# Altium PCB B217.PcbDoc
Units mm, origin at the board's own origin, x right, y up, seen from the top; angles counter-clockwise.
Board outline 22 x 40 mm, 4 copper layers (Top Copper, Signal Layer 1, Signal Layer 2, Bottom Copper), stack 1.57 mm thick; 32 components, 52 nets, 122 pads, 133 vias.
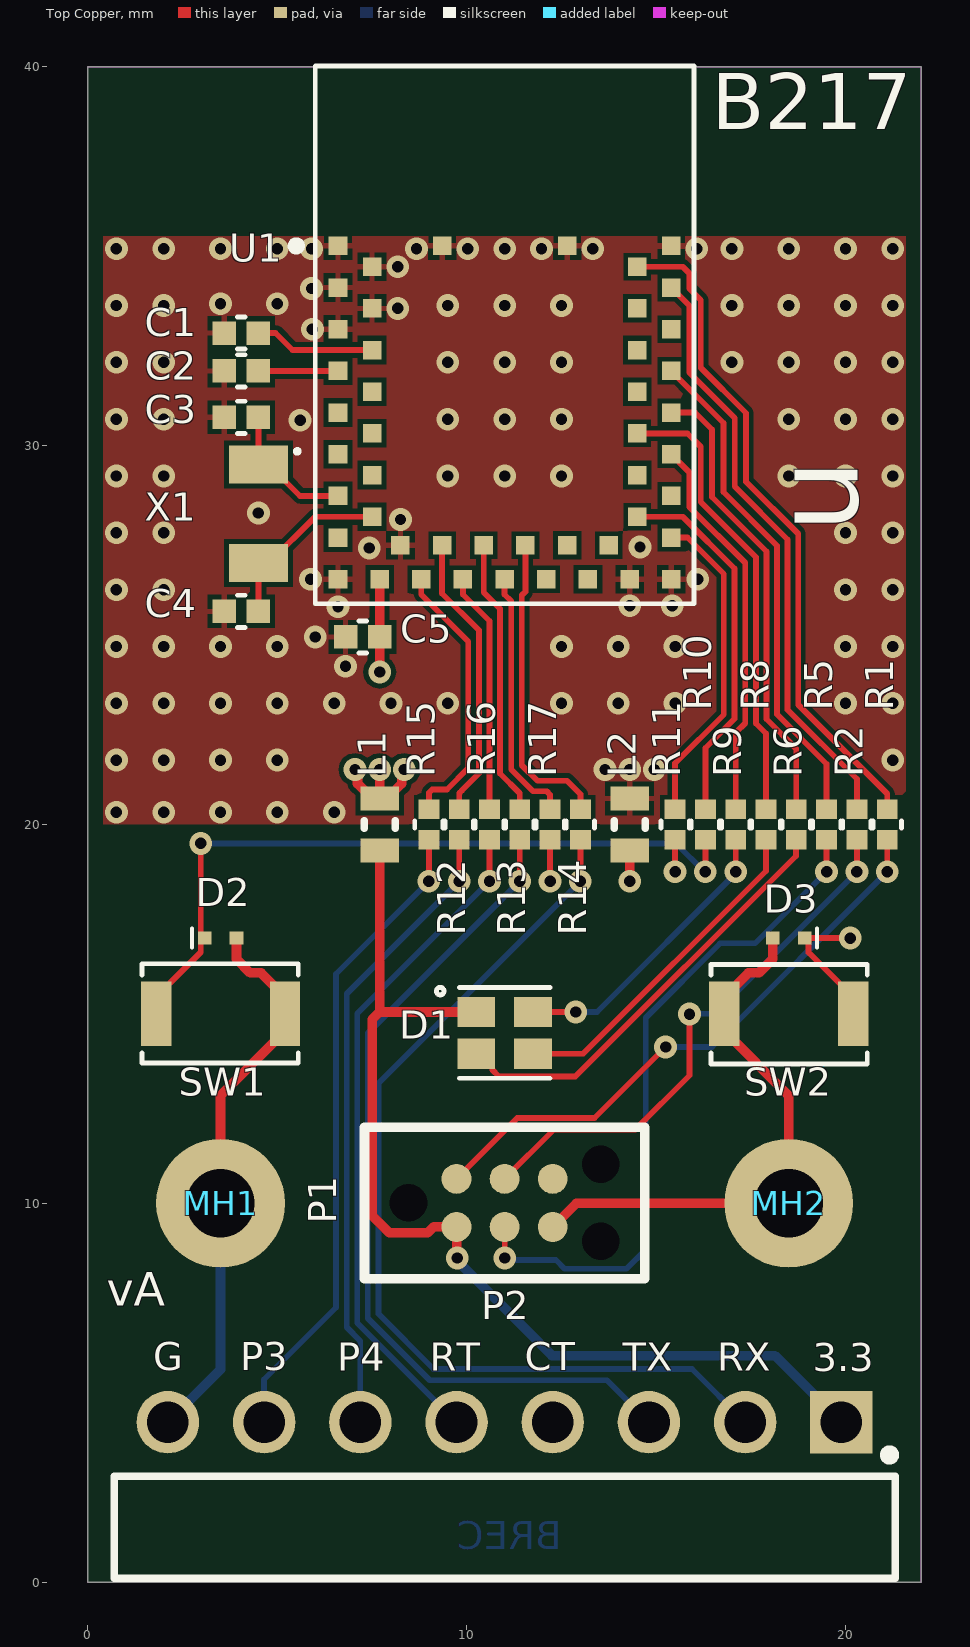
[diagram p0: Top Copper view]
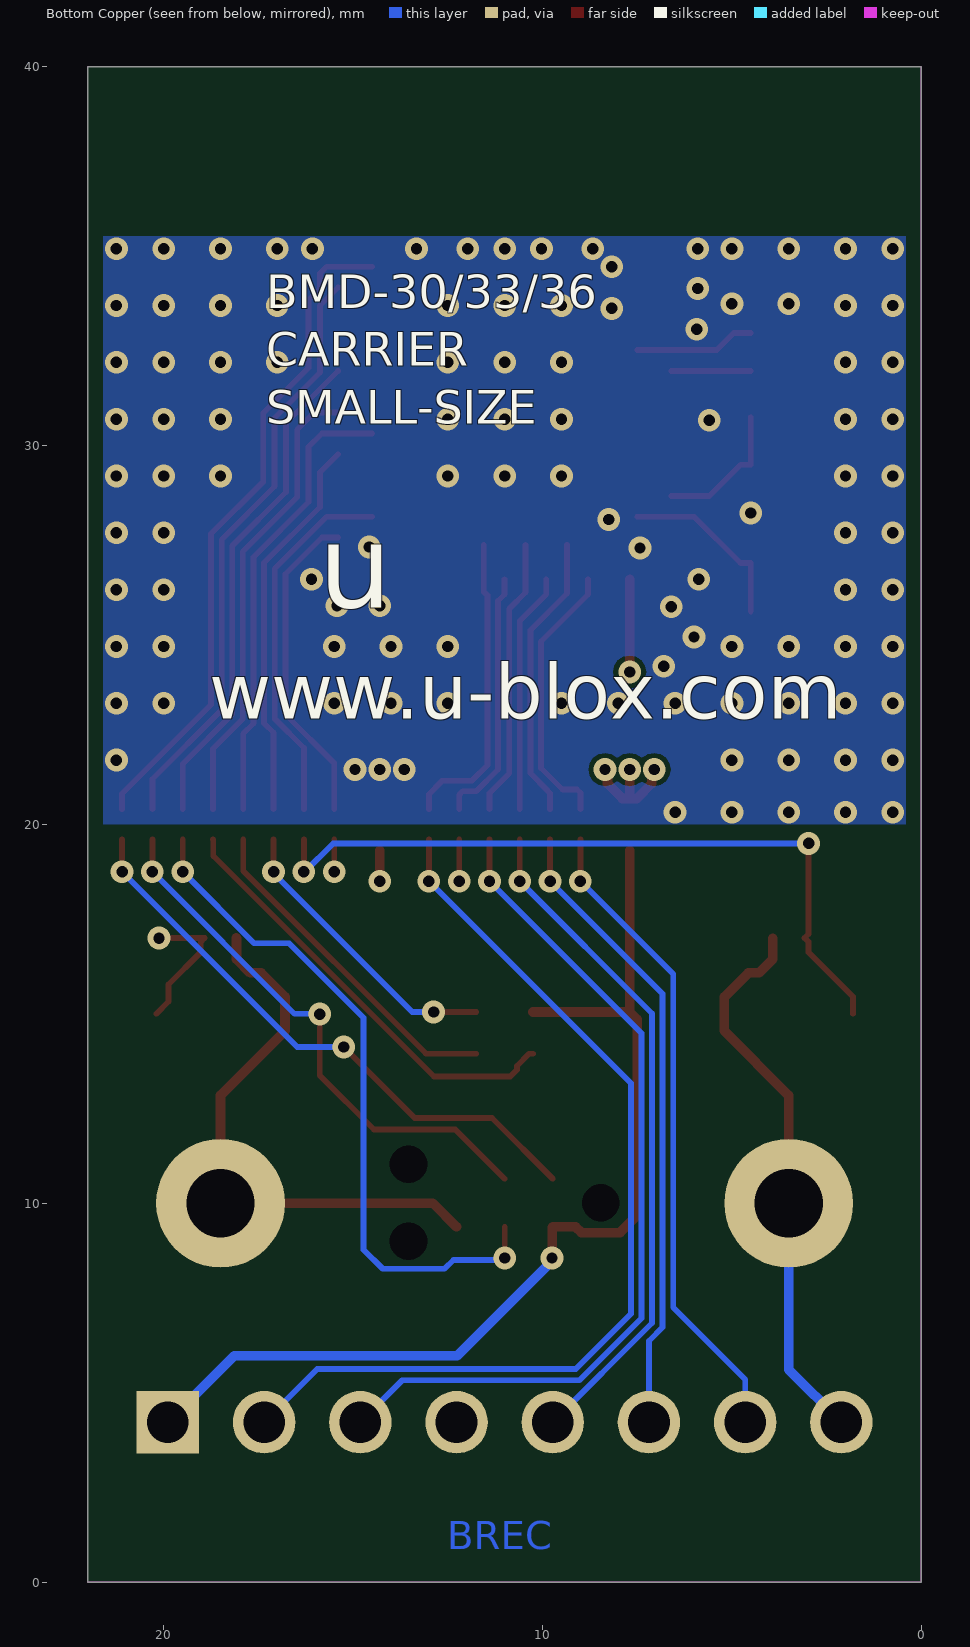
[diagram p1: Bottom Copper view, seen from below]
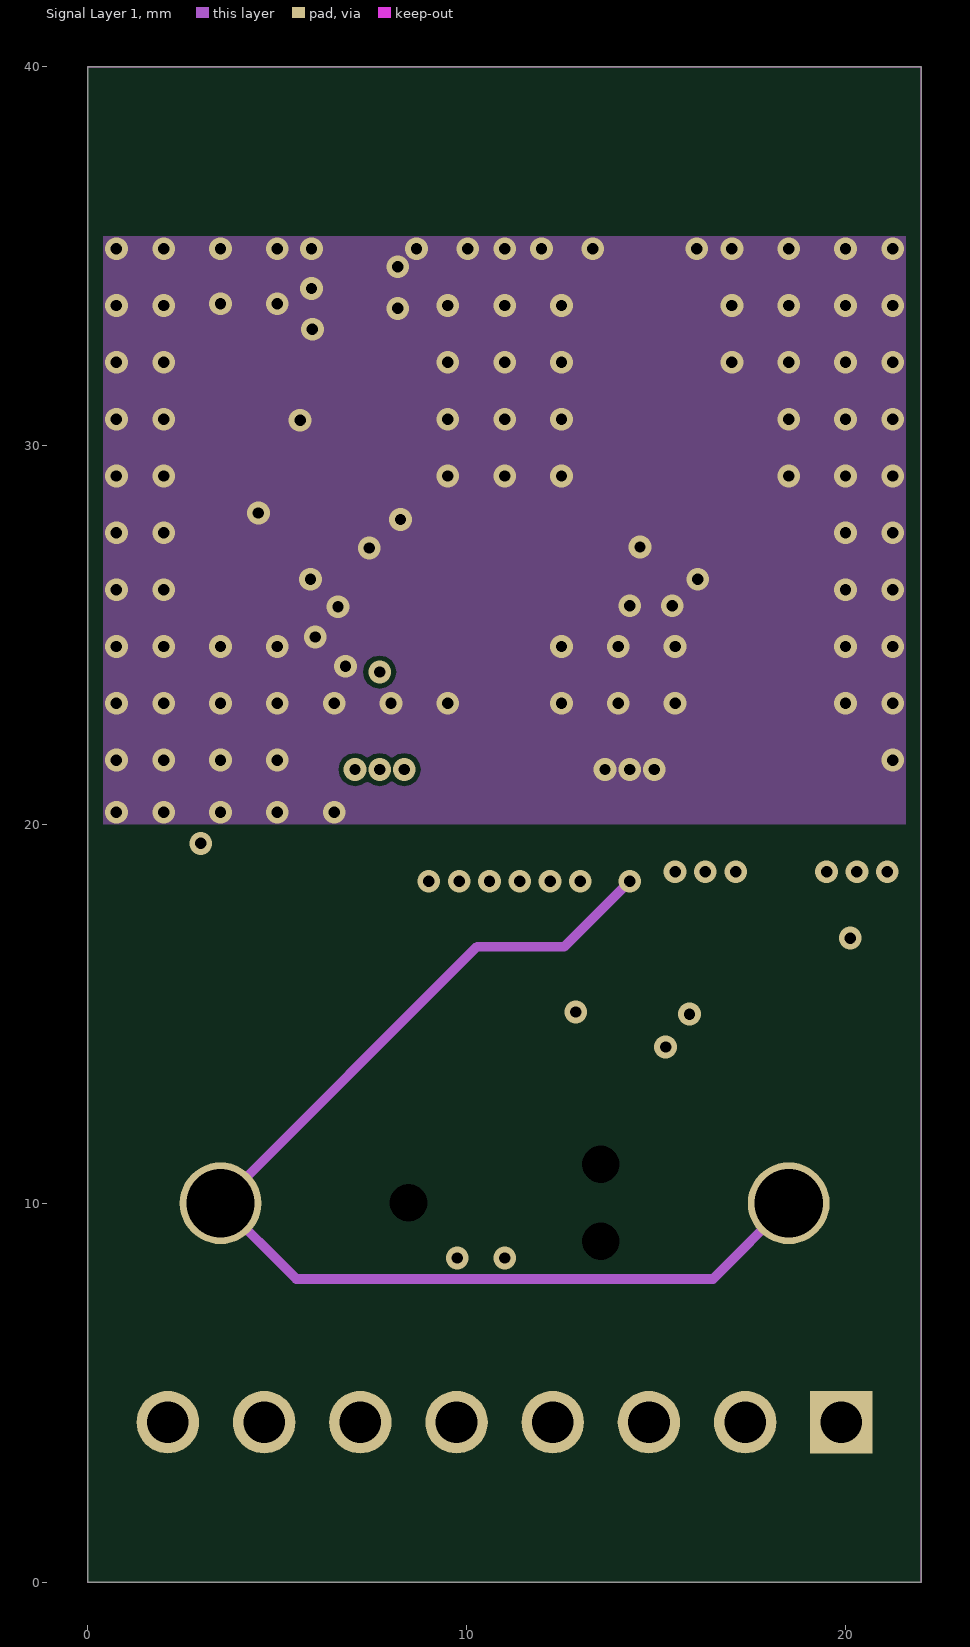
[diagram p2: Signal Layer 1]
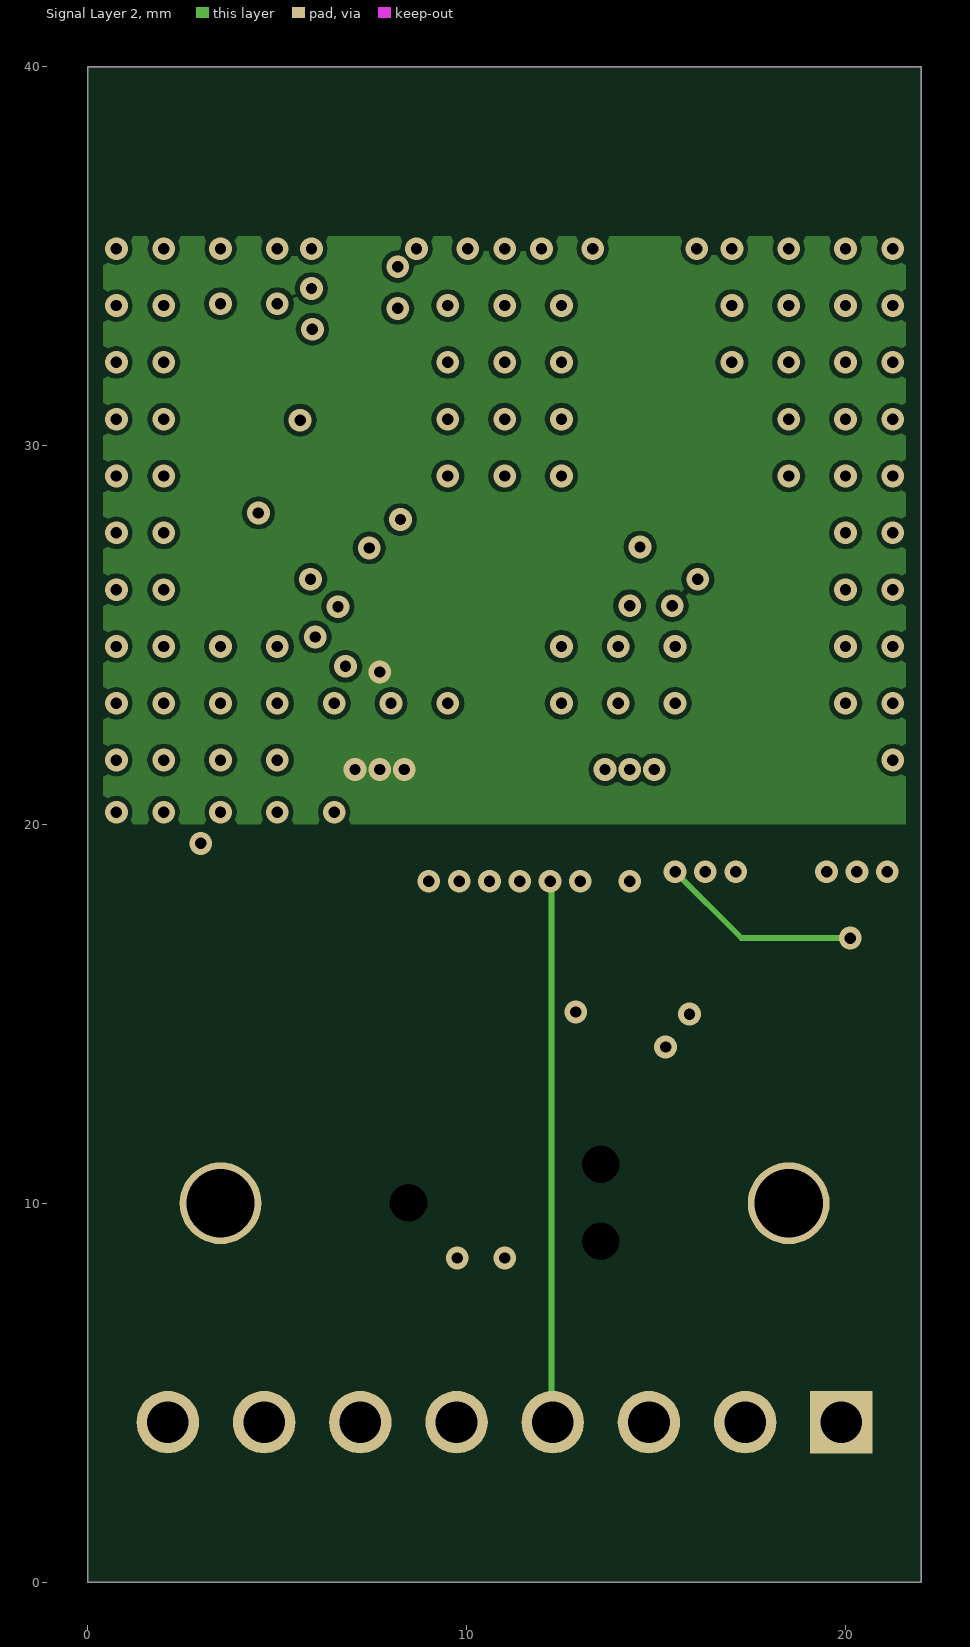
[diagram p3: Signal Layer 2]

## Layer stack, top to bottom
Top Mask: solder mask 0.015, Solder Resist, Dk 3.8
Top Copper: signal copper 0.035
Dielectric 1: prepreg 0.1, 2313, Dk 4.05
Signal Layer 1: signal copper 0.0175
Core: core 1.265, FR-4, Dk 4.5
Signal Layer 2: signal copper 0.0175
Dielectric 2: prepreg 0.1, 2313, Dk 4.05
Bottom Copper: signal copper 0.035
Bottom Mask: solder mask 0.015, Solder Resist, Dk 3.8

## Board outline
0,40 22,40 22,0 0,0

## Design rules (kind name [scope] priority, off if disabled: settings)
BoardOutlineClearance [All] p1: gap=0.4 ignorepadtopadclearanceinfootprint=FALSE
Clearance "Stitching GND" [IsStitchingVia and InNet('GND') vs (IsVia and (Not IsStitchingVia)) Or IsPad] p1: gap=0.127 ignorepadtopadclearanceinfootprint=TRUE
Clearance Clearance_Poly [InPolygon vs OnLayer('Keep-Out Layer') OR (OnLayer('Multi-Layer') AND IsPad  AND Not(PadIsPlated))] p2: gap=0.127 ignorepadtopadclearanceinfootprint=TRUE
Clearance [All] p3: gap=0.127 ignorepadtopadclearanceinfootprint=FALSE except(0: Arc-Text Arc-Hole Track-Text Track-Hole SMDPad-Text SMDPad-Hole THPad-Text THPad-Hole Via-Text Via-Hole Fill-Text Fill-Hole Poly-Text Poly-Hole Region-Text Region-Hole Text-Text Text-Hole)
ComponentClearance [All] p1: gap=0.127 collisioncheckmode=3 verticalgap=0.254 showdistances=FALSE
DiffPairsRouting .14 [All] p1: maxlimit=0.254 minlimit=0.1 mostfreqgap=0.254 toplayer_maxgap=0.1 toplayer_prefgap=0.1 toplayer_minwidth=0.1 toplayer_maxwidth=0.1 toplayer_prefwidth=0.1 midlayer1_mingap=0.254 midlayer1_minwidth=0.381 midlayer1_maxwidth=0.381 midlayer1_prefwidth=0.381 midlayer2_mingap=0.254 midlayer2_minwidth=0.381 midlayer2_maxwidth=0.381 midlayer2_prefwidth=0.381 bottomlayer_maxgap=0.1 bottomlayer_prefgap=0.1 bottomlayer_minwidth=0.1 bottomlayer_maxwidth=0.1 bottomlayer_prefwidth=0.1 maxuncoupledlength=12.7
Height [All] p1: minheight=0 maxheight=25.4 prefheight=2.54
HoleSize [All] p1: absolutevalues=TRUE maxlimit=2540 minlimit=0.127 maxpercent=80.000 minpercent=20.000
HoleToHoleClearance [All] p1: gap=0.152 allowstackedmicrovias=TRUE
MinimumSolderMaskSliver [All] p1: minsoldermaskwidth=0.025
PlaneClearance [InPoly] p1: clearance=0.254
PlaneConnect [All] p1: pad.planeconnectstyle=Relief pad.reliefexpansion=0.508 pad.reliefentries=4 pad.reliefconductorwidth=0.254 pad.reliefairgap=0.254 via.planeconnectstyle=Direct via.reliefexpansion=0.508 via.reliefentries=4 via.reliefconductorwidth=0.254 via.reliefairgap=0.254
PolygonConnect ThermalVias [IsVia] p1: connectstyle=Direct reliefconductorwidth=0.254 reliefentries=4 polygonreliefangle="90 Angle" airgapwidth=0.254
PolygonConnect "PolygonConnect - Power" [InNetClass('')] p2: connectstyle=Relief reliefconductorwidth=0.254 reliefentries=4 polygonreliefangle="90 Angle" airgapwidth=0.127
PolygonConnect PolygonConnect-BGA [InComponentClass('')] p3: connectstyle=Relief reliefconductorwidth=0.152 reliefentries=4 polygonreliefangle="45 Angle" airgapwidth=0.152
PolygonConnect PolygonConnect-General [All] p4: connectstyle=Relief reliefconductorwidth=0.152 reliefentries=4 polygonreliefangle="90 Angle" airgapwidth=0.127
RoutingVias [All] p1: holewidth=0.3 width=0.6 viastyle="Through Hole" minholewidth=0.2 minwidth=0.5 maxholewidth=7 maxwidth=1
SMDEntry [All] p1 off: side=TRUE corner=TRUE anyangle=TRUE
SilkToBoardRegionClearance [All] p1 off:
SilkToSilkClearance [All] p1 off: silktosilkclearance=0.025
SilkToSolderMaskClearance [IsPad] p1 off: minsilkscreentomaskgap=0 clearancetoexposedcopper=TRUE
SolderMaskExpansion SolderMaskExpansion_via [IsVia] p1: expansion=-0.254 istentingtop=TRUE
SolderMaskExpansion [All] p2: expansion=0.05 istentingtop=FALSE
UnRoutedNet [All] p1: checkbadconnections=TRUE
ViasUnderSMD [All] p1: allowed=FALSE
Width [All] p1: maxlimit=2.54 minlimit=0.127 preferedwidth=0.152 toplayer_maxwidth=0.254 toplayer_prefwidth=0.152 bottomlayer_maxwidth=0.254 bottomlayer_prefwidth=0.152 minimp=50.000000 maximp=50.000000 favimp=50.000000
Width Width_1 [All] p2: maxlimit=0.254 minlimit=0.254 preferedwidth=0.254
18 further rules are at their usual default settings.

## Components (designator, comment, footprint, x,y, rotation, side; value= is the part's Value field where it differs from the comment)
C1 "UBXH01-000801512P" "Cap 0402" 4.05,32.975 r180 top value=12P
C2 "UBXH01-000801512P" "Cap 0402" 4.05,31.975 r180 top value=12P
C3 "UBXH01-000411410P" "Cap 0402" 4.05,30.75 r180 top value=10P
C4 "UBXH01-000411410P" "Cap 0402" 4.05,25.625 r180 top value=10P
C5 "UBXH01-2021002100N" "Cap 0402" 7.25,24.95 r180 top value=100N
D1 "115-00011" 4-PLCC 11,14.5 r180 top
D2 "110-00019" SOD-923 3.5,17 r0 top
D3 "110-00019" SOD-923 18.5,17 r180 top
L1 "LQW18AN22NJ10D" INDC1608X100X30LL20T10 7.7,20 r90 top
L2 "LQW18AN22NJ10D" INDC1608X100X30LL20T10 14.3,20 r90 top
MH1 "MH_M1.5DNP" MH_M1.5 3.5,10 r0 top
MH2 "MH_M1.5DNP" MH_M1.5 18.5,10 r0 top
P1 "TC2030-IDC-NLDNP" TC2030-IDC-NL 8.46,10.01 r0 top
P2 "61300811021" 61300811021 11,1.45 r0 top
R1 "180-00098220R" "RES 0402 HD" 21.1,20 r270 top value=220R
R2 "180-00098220R" "RES 0402 HD" 20.3,20 r270 top value=220R
R5 "180-00098220R" "RES 0402 HD" 19.5,20 r270 top value=220R
R6 "180-00031499R" "RES 0402 HD" 18.7,20 r270 top value=499R
R8 "180-00098220R" "RES 0402 HD" 17.9,20 r270 top value=220R
R9 "180-00098220R" "RES 0402 HD" 17.1,20 r270 top value=220R
R10 "180-00098220R" "RES 0402 HD" 16.3,20 r270 top value=220R
R11 "180-00098220R" "RES 0402 HD" 15.5,20 r270 top value=220R
R12 "180-00098220R" "RES 0402 HD" 9.8,20 r90 top value=220R
R13 "180-00098220R" "RES 0402 HD" 11.4,20 r90 top value=220R
R14 "180-00098220R" "RES 0402 HD" 13,20 r90 top value=220R
R15 "180-00098220R" "RES 0402 HD" 9,20 r90 top value=220R
R16 "180-00098220R" "RES 0402 HD" 10.6,20 r90 top value=220R
R17 "180-00098220R" "RES 0402 HD" 12.2,20 r90 top value=220R
SW1 "135-00007" B3U-1000P 3.5,15 r0 top
SW2 "135-00007" B3U-1000P 18.5,15 r180 top
U1 "=Value" BMD_LGA47S_1400X980X190_PCB 11,32.925 r0 top
X1 "100-00005" XTAL_3215 4.5,28.2 r270 top

## Footprints (in the part's own frame and the unit in brackets; to place one, negate y for a bottom-side part, rotate by r counter-clockwise, add the part's x,y. Pads: shape width x height; smd on the part's side, far side on the other; paste and mask are expansions set on the pad)
4-PLCC [mm] "4 Pin Plastic Leaded Chip Carrier, 2mm x 2mm"
  rect 1x0.8 smd: 1(0.75,-0.55) 2(-0.75,-0.55) 3(-0.75,0.55) 4(0.75,0.55)
  silkscreen extent -1.2,-1.2 1.8,1.2, body extent -1.05,-1.05 1.05,1.05, height 1.01
61300811021 [mm]
  rect 1.65x1.65 hole 1.1: 1(8.89,2.77)
  round 1.65 hole 1.1: 2(6.35,2.77) 3(3.81,2.77) 4(1.27,2.77) 5(-1.27,2.77) 6(-3.81,2.77) 7(-6.35,2.77) 8(-8.89,2.77)
  silkscreen extent -10.31,-1.35 10.31,2.03, body extent -10.16,-7.27 10.16,3.09, height 2.58
B3U-1000P [mm] "Button Tactile, SMT 4mm x 2.5mm, height 1.2mm"
  rect 0.8x1.7 smd: 1(-1.7,0) 2(1.7,0)
  silkscreen extent -2.07,-1.3 2.05,1.33, body extent -2,-1.25 2,1.25, height 1.6
BMD_LGA47S_1400X980X190_PCB [mm] "LGA, 47pin, 1.1mm Pitch, 14mm x 9.8mm"
  rect 0.49x0.49 smd: 1(-4.4,2.35) 2(-3.5,1.8) 3(-4.4,1.25) 4(-3.5,0.7) 5(-4.4,0.15) 6(-3.5,-0.4) 7(-4.4,-0.95) 8(-3.5,-1.5) 9(-4.4,-2.05) 10(-3.5,-2.6) 11(-4.4,-3.15) 12(-3.5,-3.7) 13(-4.4,-4.25) 14(-3.5,-4.8) 15(-4.4,-5.35) 16(-4.4,-6.45) 17(-3.3,-6.45) 18(-2.75,-5.55) 19(-2.2,-6.45) 20(-1.65,-5.55) 21(-1.1,-6.45) 22(-0.55,-5.55) 23(0,-6.45) 24(0.55,-5.55) 25(1.1,-6.45) 26(1.65,-5.55) 27(2.2,-6.45) 28(2.75,-5.55) 29(3.3,-6.45) 30(4.4,-6.45) 31(4.4,-5.35) 32(3.5,-4.8) 33(4.4,-4.25) 34(3.5,-3.7) 35(4.4,-3.15) 36(3.5,-2.6) 37(4.4,-2.05) 38(3.5,-1.5) 39(4.4,-0.95) 40(3.5,-0.4) 41(4.4,0.15) 42(3.5,0.7) 43(4.4,1.25) 44(3.5,1.8) 45(4.4,2.35) 46(1.65,2.35) 47(-1.65,2.35)
  Multi-Layer pour cut-out: -4.9,2.6 4.9,2.6 4.9,7 -4.9,7
  silkscreen extent -5.6,-7.1 5,7.1, body extent -4.9,-7 4.9,7, height 1.86
"Cap 0402" [mm] "Chip Capacitor, 2-Leads, Body 1.00x0.50mm, IPC Medium Density"
  rect 0.62x0.62 smd: 1(-0.45,0) 2(0.45,0)
  silkscreen extent -0.1,-0.43 0.1,0.43, body extent -0.55,-0.3 0.55,0.3, height 0.6
INDC1608X100X30LL20T10 [mm] "Chip Inductor, 2-Leads, Body 1.8x1.1mm, IPC High Density"
  rect 0.64x1.02 smd: 1(-0.685,0) 2(0.685,0)
  silkscreen extent -0.1,-0.41 0.1,0.41, body extent -0.9,-0.55 0.9,0.55, height 1
MH_M1.5 [mm] "Mounting Hole M1.5 Metric, 3.4mm diameter pad"
  round 3.4 / inner round 2.159 / far side round 3.4 hole 1.8: 1(0,0)
"RES 0402 HD" [mm] "Chip Resistor, 2-Leads, Body 1.05x0.54mm, IPC High Density"
  rect 0.52x0.55 smd: 1(-0.4,0) 2(0.4,0)
  silkscreen extent -0.1,-0.38 0.1,0.38, body extent -0.55,-0.3 0.55,0.3, height 0.4
SOD-923 [mm] "SOD-923, 2-Leads, Body 1.25x2.50mm, IPC High Density,"
  rect 0.36x0.35 smd mask+0.05: 1(-0.42,0) 2(0.42,0)
  silkscreen extent -0.75,-0.25 -0.75,0.25, body extent -0.4,-0.3 0.4,0.3, height 0.4
TC2030-IDC-NL [mm] "Tag-Connect 6-Pin No Legs"
  round 0.9 hole 0.995 unplated: 0(0,0) 0(5.08,-1.016) 0(5.08,1.016)
  round 0.79 smd paste-0.39: 1(1.27,-0.635) 2(1.27,0.635) 3(2.54,-0.635) 4(2.54,0.635) 5(3.81,-0.635) 6(3.81,0.635)
  silkscreen extent -1.16,-2 6.24,2
XTAL_3215 [mm] "XTAL, 2-Leads, Body 1.50x3.20mm"
  rect 1x1.55 smd: 1(-1.3,0) 2(1.3,0)
  silkscreen extent -1.7,0.98 -1.6,1.07, body extent -1.65,-0.8 1.65,0.8, height 0.9

## Part data
C1 C2: library part UBXH01-0008015, "CAP CER COG 0402", Manufacturer="Murata Manufacturing Company, Ltd.", Manufacturer 2=None, Manufacturer P/N=GRM1555C1H120KZ01, Max Voltage=25.0V, Tolerance=10%, Automotive=None, Critical=None, Editor=andreas.thiel, Env=ROHS, Manufacturer 3=None, Manufacturer P/N 2=None, Manufacturer P/N 3=None, Max Current=None, Max Operating Temp=None, Max Power=None, Mfg P/N Datasheet=None, Mfg P/N Datasheet 2=None, Mfg P/N Datasheet 3=None, Mfg P/N Released=No, Mfg P/N Released 2=None, Mfg P/N Released 3=None, Mfg P/N Split=0, Mfg P/N Split 2=None, Mfg P/N Split 3=None, Mfg P/N Status=Obsolete, Mfg P/N Status 2=None, Mfg P/N Status 3=None, Min Operating Temp=None, Part Number=UBXH01-0008015, Part Type=Capacitor, Perferred=NONPREF, Permitted Use="Volume Products", RefDes=C, Release Data=None, Released by=None, Single Source=None, Size=0x0y, UBX Wiki=https://wiki.u-blox.com/bin/view/Operations/PartDetails?index=5383
C3 C4: library part UBXH01-0004114, "CAP CER COG 0402", Manufacturer="Murata Manufacturing Company, Ltd.", Manufacturer 2=None, Manufacturer P/N=GRM1555C1H100CZ01, Max Voltage=25.0V, Tolerance=5%, Automotive=None, Critical=None, Editor=martin.frauchiger, Env=ROHS, Manufacturer 3=None, Manufacturer P/N 2=None, Manufacturer P/N 3=None, Max Current=None, Max Operating Temp=None, Max Power=None, Mfg P/N Datasheet=None, Mfg P/N Datasheet 2=None, Mfg P/N Datasheet 3=None, Mfg P/N Released=Yes, Mfg P/N Released 2=None, Mfg P/N Released 3=None, Mfg P/N Split=0, Mfg P/N Split 2=None, Mfg P/N Split 3=None, Mfg P/N Status=Obsolete, Mfg P/N Status 2=None, Mfg P/N Status 3=None, Min Operating Temp=None, Part Number=UBXH01-0004114, Part Type=Capacitor, Perferred=PREF, Permitted Use="Volume Products", RefDes=C, Release Data="2005-09-01 15:36:53", Released by=martin.frauchiger, Single Source=None, Size=0x0y, UBX Wiki=https://wiki.u-blox.com/bin/view/Operations/PartDetails?index=5225
C5: library part UBXH01-2021002, "CAP CER X5R 0402", Manufacturer="Samsung Electro-Mechanics", Manufacturer 2=None, Manufacturer P/N=CL05A104KP5NNN, Max Voltage=10.0V, Tolerance=10%, Automotive=None, Critical=None, Editor=roland.rust, Env=GREEN, Manufacturer 3=None, Manufacturer P/N 2=None, Manufacturer P/N 3=None, Max Current=None, Max Operating Temp=None, Max Power=None, Mfg P/N Datasheet=https://wiki.u-blox.com/bin/view/Generic/Docs/DocumentSummary?index=28113, Mfg P/N Datasheet 2=None, Mfg P/N Datasheet 3=None, Mfg P/N Released=Yes, Mfg P/N Released 2=None, Mfg P/N Released 3=None, Mfg P/N Split=0, Mfg P/N Split 2=None, Mfg P/N Split 3=None, Mfg P/N Status=Active, Mfg P/N Status 2=None, Mfg P/N Status 3=None, Min Operating Temp=None, Part Number=UBXH01-2021002, Part Type=Capacitor, Perferred=PREF, Permitted Use="Volume Products", RefDes=C, Release Data="2005-07-22 13:59:44", Released by=roland.rust, Single Source=None, Size=0x0y, UBX Wiki=https://wiki.u-blox.com/bin/view/Operations/PartDetails?index=5759
D1: "LED, RGB Diffused SMT, PLCC4 4 Pin", Color=RGB, Current="20mA Red, 10mA Green, 10mA, Blue", Manufacturer="Cree, Inc.", Manufacturer P/N=CLMVB-FKA-CFHEHLCBB7a363, MFG Package=PLCC4, Package Type=Custom, Part Name="LED RGB SMT 2mm x 2mm", Supplier Part Number 1=941-CLMVBFKACFHEHLCB, Voltage=5V, Arena Link=https://app.bom.com/a/UCV39GZGZIHY581D?v=spec.summary, Body Size="2.0mm x 2.0mm", Component Mounting Type=SMT, Height=1mm, Item_Phase=Production, Mounting Type=Vertical, Number of Circuits=3, Part Number=115-00011, Part_Type=LED, Pins=4, Revision=0A, Supplier 1=Mouser, Use in new designs=Yes, Vf="2V Red, 3V Green, 3V Blue"
D2 D3: "Diode, ESD9B, 3.3V, ST5G, SOD-923", Manufacturer="ON Semiconductor", Manufacturer P/N=ESD9B3.3ST5G, MFG Package=SOD-923, Package Type=SOD, Part Name="Diode TVS 3.3V SOD-923", Voltage=3.3V, Arena Link=https://app.bom.com/a/4M5DJQ9Q9SR7DV4H?v=spec.summary, Body Size="0.8mm x 0.6mm", Component Mounting Type=SMT, Diode Type=TVS, Height=0.4mm, Item_Phase=Production, Part Number=110-00019, Part_Type=Diode, Pins=2, Revision=0A, Supplier 1=Arrow, Supplier Part Number 1=ESD9B3.3ST5G, Use in new designs=Yes
L1 L2: library part CMP-2000-06600-1, "Chip Inductor, 22 nH, +/-5%, 640 mA, -55 to 125 degC, 0603 (1608 Metric), RoHS, Tape and Reel", Current Rating=640mA, DC Resistance (DCR)=99mOhmMax, Frequency - Self Resonant=3.2GHz, Frequency - Test=100MHz, Inductance=22nH, Manufacturer=Murata, Operating Temperature=-55°C~125°C, Package / Case=0603(1608Metric), Package Description="2-Pin Surface Mount Device, Body 1.6 x 0.8 mm", Package Reference=0603, Q @ Freq=42@250MHz, Standard Package=1, Tolerance=±5%, Category=Inductors,Coils,Chokes, Datasheet URL=http://search.murata.co.jp/Ceramy/image/img/PDF/ENG/L0075S0080LQW18A_10.pdf, Datasheet Version=11/2011, Family=FixedInductors, Height - Seated (Max)="0.039\"(1.00mm)", Manufacturer URL=http://www.murata.com/, Material - Core=Non-Magnetic, Mounting Technology=SurfaceMount, Mounting Type=SurfaceMount, Online Catalog=LQWSeries, Other Names=490-6876-1, Packaging=CutTape(CT), Product Training Modules=InductorProductsChipRFInductors, Series=LQW18A_10, Shielding=Unshielded, Size / Dimension="0.063\"Lx0.031\"W(1.60mmx0.80mm)", Type=Wirewound
MH1 MH2: library part MH_M1.5, "1.5M screw mounting hole, plated", Added By="Jeremy D", Added Date=7/9/2015, DNP=DNP, Height=0mm, Part Number=MH_M1.5, Size="3.4mm x 3.4mm", Type="Mounting Hole"
P1: library part TC2030-IDC-NL, "CON PADS FOR CBL PLUG-OF-NAILS 6-PIN NO LEGS", Manufacturer="TAG Connect", Added By="Paul B", Added Date=4/22/2015, DNP=DNP, Height=0, Manufacturer P/N=TC2030-IDC-NL, Part Number=TC2030-IDC-NL, Size="6.731mm x 12.446mm"
P2: library part CMP-1502-01075-1, "THT Angled Pin Header WR-PHD, Pitch 2.54 mm, Single Row, 8 pins", Contact Resistance=20mOhm, Manufacturer="Wurth Electronics", Operating Temperature=-40to105degC, Rated Current=3A, Withstanding Voltage=500VAC, Working Voltage=250VAC, Datasheet URL=https://katalog.we-online.de/em/datasheet/6130xx11021.pdf, Gender=Male, Manufacturer Part Number=61300811021, Manufacturer URL=http://www.we-online.de, Mounting Technology=THT, Orientation=Angled, Package Reference=61300811021, Packaging=Bag, Part Number=61300811021, Pin Number=8, Pitch=2.54mm, Publisher=WurthElektronik, Row Number=Single
R1 R2 R5 R8 R9 R10 R11 R12 R13 R14 R15 R16 R17: library part 180-00098, "Resistor, 220ohm, 5%, 1/16W, 0402.", Manufacturer="Panasonic Electronic Components", Manufacturer 2="Samsung Electro-Mechanics America, Inc", Manufacturer P/N=ERJ-2GEJ221X, Manufacturer P/N 2=RC1005J221CS, Part Name="RES SMD 220 OHM 5% 1/16W 0402", Power=1/16W, Supplier Part Number 1=P220JCT-ND, Tolerance="+/- 5%", Alternate Footprint Ref="RES 0402", Arena Link=https://app.bom.com/a/8Q9HNUDUDWVBJC30?v=spec.summary, Component Mounting Type=SMT, Height=0.4mm, Item_Phase=Production, Part Number=180-00098, Part_Type=Resistor, Pins=2, Revision=0C, Size=0402, Supplier 1=Digi-Key, Supplier 2=Digi-Key, Supplier Part Number 2=1276-4360-1-ND, Use in new designs=Yes
R6: library part 180-00031, "Resistor, 499ohm, 1%, 1/16W, 0402", Manufacturer="Rohm Semiconductor", Manufacturer 2="Samsung Electro-Mechanics America, Inc", Manufacturer P/N=MCR01MRTF4990, Manufacturer P/N 2=RC1005F4990CS, Part Name="RES SMD 499 OHM 1% 1/16W 0402", Power=1/16W, Supplier Part Number 1=RHM499CDCT-ND, Tolerance="+/- 1%", Alternate Footprint Ref="RES 0402", Arena Link=https://app.bom.com/a/Q8RZ5CVCVEDU1SS5?v=spec.summary, Component Mounting Type=SMT, Height=0.4mm, Item_Phase=Production, Part Number=180-00031, Part_Type=Resistor, Pins=2, Revision=0D, Size=0402, Supplier 1=Digi-Key, Supplier 2=Digi-Key, Supplier Part Number 2=1276-3992-1-ND, Use in new designs=Yes
SW1 SW2: "Button, Momentary SPST-NO, 0.05A, 12V, 3mm x 2.5mm", Current=50mA, Manufacturer="Omron Electronics Inc-EMC Div", Manufacturer P/N=B3U-1000P, Part Name="SWITCH TACTILE SPST-NO 0.05A 12V", Supplier Part Number 1=SW1020CT-ND, Voltage=12VDC, Arena Link=https://app.bom.com/a/TBU28FYFYHGV5FQ0?v=spec.summary, Body Size="3mm x 2.5mm", Component Mounting Type=SMT, Height=1.2mm, Item_Phase=Production, Part Number=135-00007, Part_Type=Button, Pins=2, Revision=0A, Supplier 1=Digi-Key, Switch/Button Circuit=SPST, Switch/Button Function=Off-Mom, Use in new designs=Yes
U1: library part BMD-300, "u-blox BMD-300 Bluetooth 5 LE module", Manufacturer=u-blox, Manufacturer P/N=BMD-300-A-R, Body Size="14mm x 9.8mm", Height=1.9mm, Internal Antenna=PCB, Part Number=BMD-300, Protocol="BT 5 LE, 2.4GHz Proprietary"
X1: "XTAL, 2Pin, 32.768kHz, 7pF 20ppm", Frequency=32.768kHz, Frequency Tolerance=20ppm, Manufacturer=Epson, Manufacturer 2="AVX Corporation", Manufacturer P/N="FC-135 32.7680KA-AG3", Manufacturer P/N 2=ST3215SB32768C0HPWBB, MFG Package=2-SMD, Part Name="XTAL 32.768kHz 7pF 20ppm 3215", Supplier Part Number 1=SER4086CT-ND, Arena Link=https://app.bom.com/a/L3MU07Q7Q98O5PC8?v=spec.summary, Body Size="3.2mm x 1.5mm", CL=7pF, Component Mounting Type=SMT, Height=0.9mm, Item_Phase=Production, Part Number=100-00005, Part_Type=Crystal/Oscillator, Pins=2, Revision=0C, Supplier 1=Digi-Key, Supplier 2=Digi-Key, Supplier Part Number 2=1253-1113-1-ND, Use in new designs=Yes

## Via types
v1: diameter 0.6, hole 0.3, Top Copper to Bottom Copper, tented both sides, 133 vias

## Nets (pads, with @x,y where several pads share a name; then routed paths per layer and width w, separated by ;. In a path a pad name is that pad's centre, name@x,y a point inside that pad or via, vN(x,y) a via of type N, cw(c..) or ccw(c..) an arc to the next point about the centre after c; other vN are vias at no path point)
3V3: D1.1 L1.1 P1.1 P2.1 | length 27.6
  Top Copper w0.254: L1.1 7.7,15.05 ; v1(9.75,8.554) 9.74,8.564 9.74,9.365 P1.1 9.125,9.375 8.975,9.225 7.95,9.225 7.5,9.675 7.5,14.85 7.7,15.05 ; D1.1 7.7,15.05
  Bottom Copper w0.254: v1(9.75,8.554) 9.75,8.475 12.25,5.975 18.135,5.975 P2.1
3V3_M: C5.1 L1.2 U1.17 | length 6.6
  Top Copper w0.254: v1(7.05,21.45) 7.116,21.384 7.116,21.079 7.51,20.685 L1.2 ; v1(7.7,21.45) L1.2 ; v1(7.7,24.025) U1.17@7.7,26.275 ; C5.1@7.7,25.15 U1.17 ; v1(8.35,21.45) 8.284,21.384 8.284,21.079 7.89,20.685 L1.2
B1_M: R10.1 U1.32 | length 9.8
  Top Copper w0.152: U1.32 15.705,28.125 17.071,26.759 17.071,22.791 16.3,22.02 R10.1
B2_M: R11.1 U1.31 | length 8.5
  Top Copper w0.152: U1.31 15.825,27.575 16.788,26.612 16.788,22.902 15.5,21.614 R11.1
BLUE: D1.2 R9.2 | length 7.8
  Top Copper w0.152: D1.2 v1(12.875,15.05) ; v1(17.1,18.75) 17.1,19.594 17.097,19.597 R9.2
  Bottom Copper w0.152: v1(12.875,15.05) 13.436,15.05 17.1,18.714 v1(17.1,18.75)
BLUE_M: R9.1 U1.35 | length 10.3
  Top Copper w0.152: U1.35 15.875,29.3 15.875,28.385 17.35,26.91 17.35,22.675 17.1,22.425 R9.1
BUTTON_1: D2.1 R10.2 SW1.1 | length 19.6
  Top Copper w0.152: SW1.1 1.8,15.45 2.976,16.626 2.976,16.901 3.075,17 D2.1 2.975,17.105 v1(2.975,19.5) ; v1(16.3,18.75) R10.2
  Bottom Copper w0.152: v1(2.975,19.5) 15.525,19.5 16.275,18.75 v1(16.3,18.75)
BUTTON_2: D3.1 R11.2 SW2.1 | length 9.9
  Top Copper w0.152: v1(15.5,18.75) R11.2 ; D3.1@18.915,17 D3.1 D3.1@18.925,17 ; v1(20.125,17) D3.1@18.925,17 ; SW2.1 19.876,15.324 19.876,15.774 19.024,16.626 19.024,16.901 D3.1@18.925,17
  Signal Layer 2 w0.152: v1(15.5,18.75) 17.25,17 v1(20.125,17)
CTS: P2.4 R17.1 | length 15.4
  Top Copper w0.152: v1(12.2,18.5) R17.1
  Signal Layer 2 w0.152: v1(12.2,18.5) 12.235,18.465 12.235,4.255 P2.4
GND: D2.2 D3.2 L2.1 MH1.1 MH2.1 P1.5 P2.8 SW1.2 SW2.2 | length 61.5
  Top Copper w0.254: MH1.1 3.5,12.85 5.2,14.55 SW1.2 5.2,15.45 4.567,16.083 4.28,16.083 3.92,16.444 D2.2 ; P1.5 12.895,10 MH2.1 18.5,12.85 16.8,14.55 SW2.2 16.8,15.45 17.434,16.084 17.719,16.084 18.08,16.444 D3.2 D3.2@18.085,17.005 ; v1(14.3,18.5) L2.1
  Signal Layer 1 w0.254: v1(14.3,18.5) 12.575,16.775 10.275,16.775 MH1.1 5.5,8 16.5,8 MH2.1
  Signal Layer 2 w0.254: v1(14.3,18.5) v1@14.354,18.554
  Bottom Copper w0.254: P2.8 3.5,5.61 MH1.1
GND_M: C1.2 C2.2 C3.2 C4.2 C5.2 L2.2 U1.1 U1.2 U1.3 U1.4 U1.5 U1.16 U1.18 U1.29 U1.30 U1.45 U1.46 U1.47
  other v1: 0.75,20.325 2,20.325 3.5,20.325 5,20.325 6.5,20.325 13.65,21.45 14.3,21.45 14.95,21.45 0.75,21.7 2,21.7 3.5,21.7 5,21.7 21.25,21.7 0.75,23.2 2,23.2 3.5,23.2 5,23.2 6.5,23.2 8,23.2 9.5,23.2 12.5,23.2 14,23.2 15.5,23.2 20,23.2 21.25,23.2 6.8,24.175 0.75,24.7 2,24.7 3.5,24.7 5,24.7 12.5,24.7 14,24.7 15.5,24.7 20,24.7 21.25,24.7 6,24.95 6.6,25.75 14.3,25.775 15.425,25.775 0.75,26.2 2,26.2 20,26.2 21.25,26.2 5.875,26.475 16.1,26.475 7.425,27.3 14.575,27.325 0.75,27.7 2,27.7 20,27.7 21.25,27.7 8.25,28.05 4.5,28.225 0.75,29.2 2,29.2 9.5,29.2 11,29.2 12.5,29.2 18.5,29.2 20,29.2 21.25,29.2 5.6,30.675 0.75,30.7 2,30.7 9.5,30.7 11,30.7 12.5,30.7 18.5,30.7 20,30.7 21.25,30.7 0.75,32.2 2,32.2 9.5,32.2 11,32.2 12.5,32.2 17,32.2 18.5,32.2 20,32.2 21.25,32.2 5.925,33.075 8.175,33.625 0.75,33.7 2,33.7 9.5,33.7 11,33.7 12.5,33.7 17,33.7 18.5,33.7 20,33.7 21.25,33.7 3.5,33.75 5,33.75 5.9,34.15 8.175,34.725 0.75,35.2 2,35.2 3.5,35.2 5,35.2 5.9,35.2 8.675,35.2 10.025,35.2 11,35.2 11.975,35.2 13.325,35.2 16.075,35.2 17,35.2 18.5,35.2 20,35.2 21.25,35.2
GREEN: D1.3 R8.2 | length 9
  Top Copper w0.152: D1.3 13.075,13.95 17.9,18.775 R8.2
GREEN_M: R8.1 U1.36 | length 12.1
  Top Copper w0.152: U1.36 15.825,30.325 16.175,29.975 16.175,28.515 17.633,27.057 17.633,22.667 17.9,22.4 R8.1
LFCLK1: C4.1 U1.14 X1.2 | length 4.8
  Top Copper w0.152: C4.1 X1.2 4.775,26.9 6,28.125 U1.14
LFCLK2: C3.1 U1.13 X1.1 | length 3.7
  Top Copper w0.152: C3.1 X1.1 4.775,29.5 5.6,28.675 U1.13
NetC1_1: C1.1 U1.6 | length 3.2
  Top Copper w0.152: C1.1 4.95,32.975 5.4,32.525 U1.6
NetC2_1: C2.1 U1.7 | length 2.1
  Top Copper w0.152: C2.1 U1.7
NetR12_2: R12.2 U1.20 | length 7.6
  Top Copper w0.152: U1.20 9.35,26.375 9.35,26.1 10.321,25.129 10.321,21.35 9.875,20.904 9.875,20.9 9.8,20.825 R12.2
NetR13_2: R13.2 U1.22 | length 7.4
  Top Copper w0.152: U1.22 10.45,26.125 10.879,25.696 10.879,21.346 11.4,20.825 R13.2
NetR14_2: R14.2 U1.24 | length 8.1
  Top Copper w0.152: U1.24 11.55,26.146 11.454,26.05 11.454,21.566 11.866,21.154 12.646,21.154 13,20.8 R14.2
NetR15_2: R15.2 U1.19 | length 7.2
  Top Copper w0.152: U1.19 8.8,26.075 10.041,24.834 10.041,21.491 9.475,20.925 9.089,20.925 9,20.836 R15.2
NetR16_2: R16.2 U1.21 | length 6.4
  Top Copper w0.152: U1.21 9.9,26.075 10.6,25.375 R16.2
NetR17_2: R17.2 U1.23 | length 6.8
  Top Copper w0.152: U1.23 11,26.075 11.175,25.9 11.175,21.45 11.75,20.875 12.111,20.875 12.2,20.786 R17.2
NetU1_8: U1.8
NetU1_9: U1.9
NetU1_10: U1.10
NetU1_11: U1.11
NetU1_12: U1.12
NetU1_15: U1.15
NetU1_25: U1.25
NetU1_26: U1.26
NetU1_27: U1.27
NetU1_28: U1.28
NetU1_33: U1.33
NetU1_34: U1.34
NetU1_38: U1.38
NetU1_40: U1.40
NetU1_41: U1.41
NetU1_42: U1.42
nRESET: P1.3 R5.2 | length 18.2
  Top Copper w0.152: v1(11,8.554) P1.3 ; v1(19.5,18.75) R5.2
  Bottom Copper w0.152: v1(11,8.554) 11.054,8.5 12.353,8.5 12.584,8.268 14.218,8.268 14.725,8.775 14.725,14.9 16.686,16.861 17.611,16.861 v1(19.5,18.75)
nRESET_M: R5.1 U1.39 | length 13.3
  Top Copper w0.152: U1.39 16.775,30.6 16.775,28.775 18.191,27.359 18.191,22.909 19.5,21.6 R5.1
P0.03: P2.7 R15.1 | length 17.2
  Top Copper w0.152: v1(9,18.5) R15.1
  Bottom Copper w0.152: P2.7 4.65,5.35 6.55,7.25 6.55,16.05 v1(9,18.5)
P0.04: P2.6 R12.1 | length 16.8
  Top Copper w0.152: v1(9.8,18.5) R12.1
  Bottom Copper w0.152: P2.6 7.19,6.365 6.829,6.726 6.829,15.529 v1(9.8,18.5)
RED: D1.4 R6.2 | length 11.6
  Top Copper w0.152: D1.4 10.35,13.95 10.674,13.626 10.674,13.526 10.853,13.347 12.867,13.347 18.69,19.17 18.69,19.59 R6.2
RED_M: R6.1 U1.37 | length 12.2
  Top Copper w0.152: U1.37 16.025,30.875 16.475,30.425 16.475,28.645 17.912,27.208 17.912,22.788 18.7,22 R6.1
RTS: P2.5 R16.1 | length 17.9
  Top Copper w0.152: v1(10.6,18.5) R16.1
  Bottom Copper w0.152: P2.5 7.109,6.841 7.109,15.009 v1(10.6,18.5)
RXD: P2.2 R14.1 | length 25.6
  Top Copper w0.152: v1(13,18.5) R14.1
  Bottom Copper w0.152: v1(13,18.5) 7.667,13.167 7.667,7.083 9.125,5.625 15.945,5.625 P2.2
SWCLK: P1.4 R2.2 | length 14.5
  Top Copper w0.152: P1.4 12.301,11.946 14.451,11.946 15.881,13.376 v1(15.881,14.994) ; v1(20.3,18.75) R2.2
  Bottom Copper w0.152: v1(15.881,14.994) 15.887,15 16.55,15 v1(20.3,18.75)
SWCLK_M: R2.1 U1.43 | length 15.8
  Top Copper w0.152: U1.43 15.875,33.7 15.875,31.93 17.075,30.73 17.075,28.92 18.47,27.525 18.47,23.03 20.3,21.2 R2.1
SWDIO: P1.2 R1.2 | length 15.6
  Top Copper w0.152: P1.2 11.335,12.25 13.375,12.25 v1(15.25,14.125) ; v1(21.1,18.75) 21.1,19.597 21.102,19.598 R1.2
  Bottom Copper w0.152: v1(15.25,14.125) 16.475,14.125 v1(21.1,18.75)
SWDIO_M: R1.1 U1.44 | length 17.8
  Top Copper w0.152: U1.44 15.7,34.725 15.873,34.552 15.873,34.152 16.179,33.846 16.179,32.056 17.375,30.86 17.375,29.05 18.749,27.676 18.749,23.162 21.1,20.811 R1.1
TXD: P2.3 R13.1 | length 22.9
  Top Copper w0.152: v1(11.4,18.5) R13.1
  Bottom Copper w0.152: v1(11.4,18.5) 7.388,14.488 7.388,6.962 9.025,5.325 13.705,5.325 P2.3
pads on no net: P1.0 P1.6

## Polygon pours and split planes (outlines as drawn)
GND_M on Top Copper "GND_M_L01_P010" (solid, remove dead copper, pour order 10): 0,40 0,20 22,20 22,40
GND_M on Bottom Copper "GND_M_L04_P011" (solid, remove dead copper, pour order 11): 0,40 0,20 22,20 22,40
GND_M on Signal Layer 1 "NONET_L-01_P-001" (solid, remove dead copper, pour order 12): 0,35.525 22,35.525 22,20 0,20
3V3_M on Signal Layer 2 "NONET_L-01_P-001" (solid, remove dead copper, pour order 13): 0,35.525 22,35.525 22,20 0,20

## Keep-outs
Keep-Out Layer:
  the board outline again, w0.025

## Other copper
Top Copper:
  pour cut-out: 10.1,10.625 11.9,10.625 12.25,10.275 12.25,9.725 11.9,9.375 10.1,9.375 10.1,9.4 9.75,9.75 9.75,10.275
  pour cut-out: 0,40 0,35.525 22,35.525 22,40
Bottom Copper:
  pour cut-out: 0,40 0,35.525 22,35.525 22,40
  pour cut-out: 9.688,0.4 9.688,1.45 12.313,1.45 12.313,0.4
  text "BREC" at 12.511,0.613 h1.27

## Silkscreen, mask and mechanical layers (free items; w line width, h text height)
Top Overlay:
  text "B217" at 16.473,37.87 h2.54
  text "u" at 21.05,27.7 h3.81 r90
  text "vA" at 0.5,7 h1.52
  text "G" at 1.724,5.338 h1.27
  text "P3" at 4.026,5.34 h1.27
  text "P4" at 6.577,5.325 h1.27
  text "RT" at 9.025,5.325 h1.27
  text "CT" at 11.534,5.338 h1.27
  text "TX" at 14.117,5.325 h1.27
  text "RX" at 16.61,5.325 h1.27
  text "3.3" at 19.136,5.315 h1.27
Bottom Overlay:
  text "BMD-30/33/36 / CARRIER  / SMALL-SIZE" at 17.294,30.294 h1.52
  text "u" at 15.913,24.994 h3.81
  text "www.u-blox.com" at 18.796,22.31 h2.5
Route Tool Path:
  the board outline again, w0.127